# EAGLE board Powerful Blorr-Gaaris (EAGLE 9.7.0)

Size 220.66 x 192.72 mm. Coordinates in mm from the lower left corner, seen from the top.
Outline: 0,0 220.66,0 220.66,192.72 0,192.72 0,0
Copper layers (1*16): Top 0.035mm / dielectric 1.5mm / Bottom 0.035mm
Design rules "default": minimum track width 6mil, minimum drill 0.35mm, track to track 6mil, track to pad 6mil, pad to pad 6mil, via to via 6mil, smd to smd 6mil, copper to edge 40mil, drill to drill 6mil, minimum pad ring 10mil, minimum via ring 8mil, stop-mask expansion 4mil, vias tented up to drill 0mil, thermal gap 10mil

## Footprints (pad centres in the part's own frame; a part is rotated, then mirrored left to right if it is on the bottom)
DIODE-AXIAL = drill 1: 1 -5.08,0; 2 5.08,0
LEDRD254W60D565H860B_B = drill 0.981 pad 1.581: 1 -1.27,0; 2 1.27,0
LEDRD254W60D565H860B = drill 0.981 pad 1.581: 1 -1.27,0; 2 1.27,0
LEDRD254W60D565H860B_G = drill 0.981 pad 1.581: 1 -1.27,0; 2 1.27,0
LEDRD254W60D565H860B_Y = drill 0.981 pad 1.581: 1 -1.27,0; 2 1.27,0
HC-SR04 = drill 1.016 long: 1 -3.81,0; 2 -1.27,0; 3 1.27,0; 4 3.81,0
MOTOR = drill 1.118 pad 3.15 octagon: + 2.54,0; - -2.54,0
RESAD1016W63L850D250B = drill 0.83 pad 1.43: 1 -5.08,0; 2 5.08,0
HA-06-SM065 = drill 1 pad 1.676: 1 -2.54,-2.54; 2 0,2.54; 3 2.54,-2.54
SEN-13322 = drill 1.016 long: 1 -2.54,0; 2 0,0; 3 2.54,0
TO92 = drill 0.813 octagon: 1 -1.27,0; 2 0,1.905; 3 1.27,0
ARDUINO-UNO-R3-SHIELD = drill 1.016 pad 1.88: 3.3V 24.13,-2.54; 5V 24.13,0; A0 24.13,12.7; A1 24.13,15.24; A2 24.13,17.78; A3 24.13,20.32; A4 24.13,22.86; A5 24.13,25.4; AREF -24.13,-13.97; D2 -24.13,20.32; D3 -24.13,17.78; D4 -24.13,15.24; D5 -24.13,12.7; D6 -24.13,10.16; D7 -24.13,7.62; D8 -24.13,3.81; D9 -24.13,1.27; D10 -24.13,-1.27; D11 -24.13,-3.81; D12 -24.13,-6.35; D13 -24.13,-8.89; GND@0 24.13,2.54; GND@1 24.13,5.08; GND@2 -24.13,-11.43; IOREF 24.13,-7.62; NC 24.13,-10.16; RES 24.13,-5.08; RX -24.13,25.4; SCL -24.13,-19.05; SDA -24.13,-16.51; TX -24.13,22.86; VIN 24.13,7.62
JHD-162A = drill 1.016 long: 1 -19.05,0; 2 -16.51,0; 3 -13.97,0; 4 -11.43,0; 5 -8.89,0; 6 -6.35,0; 7 -3.81,0; 8 -1.27,0; 9 1.27,0; 10 3.81,0; 11 6.35,0; 12 8.89,0; 13 11.43,0; 14 13.97,0; 15 16.51,0; 16 19.05,0

## Placement (x,y rotation side)
D1  DIODEDIODE-AXIAL  [DIODE-AXIAL]  27.36,73.72 180 top
D2  BLUE  [LEDRD254W60D565H860B_B]  97.14,99.84 270 top
D3  RED  [LEDRD254W60D565H860B]  103.39,96.12 270 top
D4  GREEN  [LEDRD254W60D565H860B_G]  111.01,94.76 270 top
D5  YELLOW  [LEDRD254W60D565H860B_Y]  118.63,96.12 270 top
DIST1  DISTANCE-SENSOR-4PINHC-SR04  [HC-SR04]  26.04,185.1 0 top
M1  MOTOR_HDR  [MOTOR]  24.61,97.36 0 top
R1  1k  [RESAD1016W63L850D250B]  184.08,49.2 90 top
R2  10  [RESAD1016W63L850D250B]  40.06,78.8 0 top
R3  220  [RESAD1016W63L850D250B]  101.54,103.65 210 top
R4  220  [RESAD1016W63L850D250B]  105.93,101.79 240 top
R5  220  [RESAD1016W63L850D250B]  111.01,101.11 270 top
R6  220  [RESAD1016W63L850D250B]  116.09,101.79 300 top
RPOT2  250k  [HA-06-SM065]  151.06,56.82 0 top
SEN1  SEN-13322  [SEN-13322]  74.42,80.09 0 top
T1  NPN  [TO92]  34.98,71.18 180 top
U1  ARDUINO-UNO-R3-SHIELD  [ARDUINO-UNO-R3-SHIELD]  92.98,130.32 270 top
U2  LCD-16X2JHD-162A  [JHD-162A]  165.03,36.63 0 top

## Library data of the parts
D1 DIST1 M1 R1-R6 RPOT2 SEN1 U1 U2 = Tinkercad
D2 = Tinkercad; CATEGORY: Opto-Electronic; SUB-CATEGORY: LED; VALUE: LED_BLUE
D3 = Tinkercad; CATEGORY: Opto-Electronic; SUB-CATEGORY: LED; VALUE: LED_RED
D4 = Tinkercad; CATEGORY: Opto-Electronic; SUB-CATEGORY: LED; VALUE: LED_GREEN
D5 = Tinkercad; CATEGORY: Opto-Electronic; SUB-CATEGORY: LED; VALUE: LED_YELLOW
T1 = Tinkercad; CATEGORY: Transistor; SUB-CATEGORY: BJT; TYPE: NPN

## Nets
D2_A: D2.1 R3.2
D3_A: D3.1 R4.2
D4_A: D4.1 R5.2
D5_A: D5.1 R6.2
M1_+: D1.1 M1.+ T1.3
M1_-: D1.2 M1.-
T1_B: R2.1 T1.2
U1_5V: DIST1.1 RPOT2.1 SEN1.1 T1.1 U1.5V U2.2 U2.15
U1_A0: R3.1 U1.A0
U1_A1: R4.1 U1.A1
U1_A2: R5.1 U1.A2
U1_A3: R6.1 U1.A3
U1_D3: R2.2 U1.D3
U1_D4: U1.D4 U2.14
U1_D5: U1.D5 U2.13
U1_D6: U1.D6 U2.12
U1_D7: U1.D7 U2.11
U1_D9: DIST1.3 U1.D9
U1_D10: DIST1.2 U1.D10
U1_D11: U1.D11 U2.6
U1_D12: U1.D12 U2.4
U1_D13: SEN1.3 U1.D13
U1_GND: D2.2 D3.2 D4.2 D5.2 DIST1.4 R1.2 RPOT2.3 SEN1.2 U1.GND@0 U1.GND@1 U1.GND@2 U2.1 U2.5
U2_LED-: R1.1 U2.16
U2_VO: RPOT2.2 U2.3

## Tracks (layer width: path | path; a pad name or v marks a point on that pad's centre or on a via)
D2_A  (1 unrouted)
D3_A  (1 unrouted)
D4_A  (1 unrouted)
D5_A  (1 unrouted)
M1_+  (2 unrouted)
M1_-  (1 unrouted)
T1_B  (1 unrouted)
U1_5V  (6 unrouted)
U1_A0  (1 unrouted)
U1_A1  (1 unrouted)
U1_A2  (1 unrouted)
U1_A3  (1 unrouted)
U1_D3  (1 unrouted)
U1_D4  (1 unrouted)
U1_D5  (1 unrouted)
U1_D6  (1 unrouted)
U1_D7  (1 unrouted)
U1_D9  (1 unrouted)
U1_D10  (1 unrouted)
U1_D11  (1 unrouted)
U1_D12  (1 unrouted)
U1_D13  (1 unrouted)
U1_GND  (12 unrouted)
U2_LED-  (1 unrouted)
U2_VO  (1 unrouted)